# EAGLE board KnivesPanel (EAGLE 9.6.0)
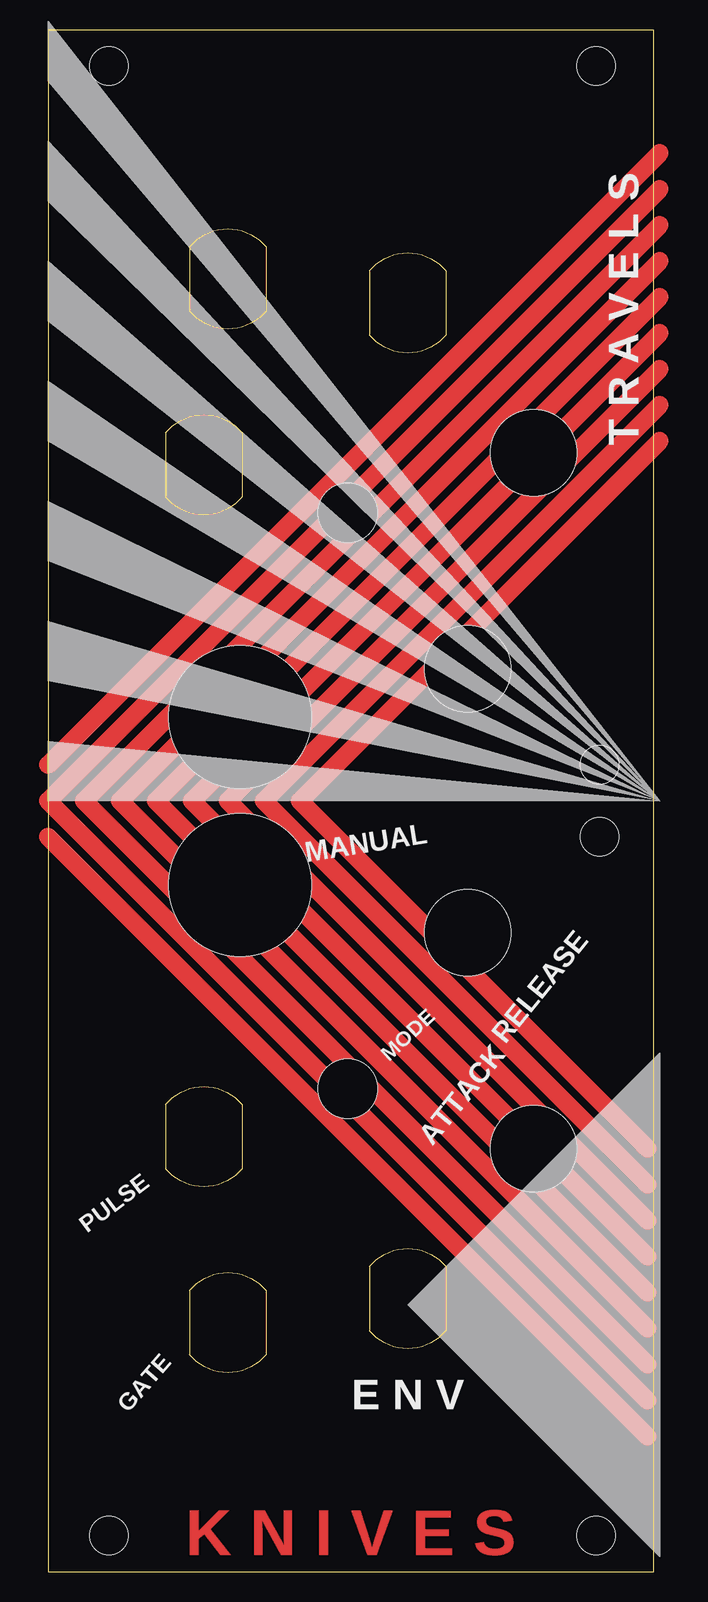
[diagram p0: board, top side]
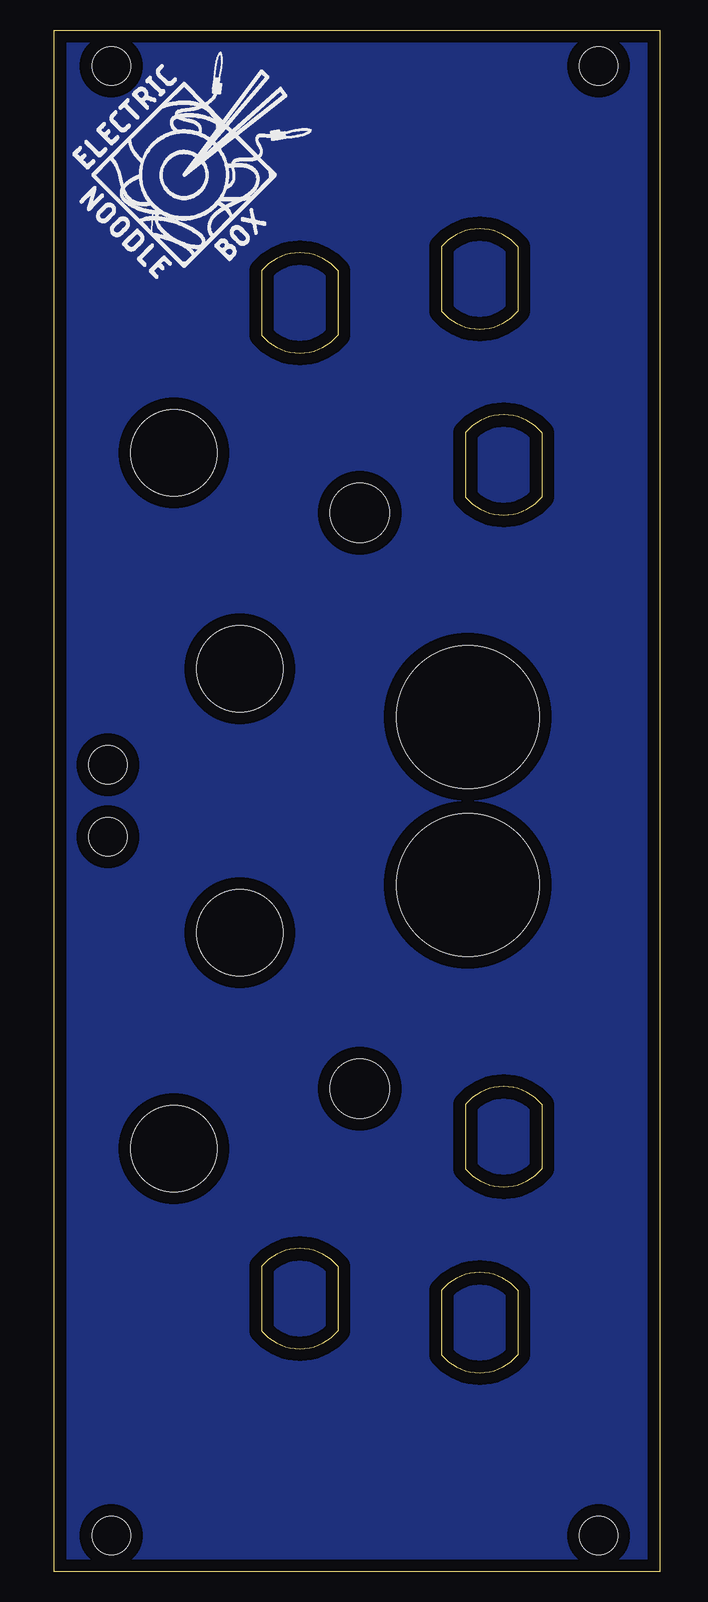
[diagram p1: board, bottom side, seen from below]

Size 50.5 x 128.5 mm. Coordinates in mm from the lower left corner, seen from the top.
Outline: 0,0 50.5,0 50.5,128.5 0,128.5 0,0
Copper layers (1*16): Top 0.035mm / dielectric 1.5mm / Bottom 0.035mm
Design rules "default": minimum track width 6mil, minimum drill 0.35mm, track to track 6mil, track to pad 6mil, pad to pad 6mil, via to via 6mil, smd to smd 6mil, copper to edge 40mil, drill to drill 6mil, minimum pad ring 10mil, minimum via ring 8mil, stop-mask expansion 4mil, vias tented up to drill 0mil, thermal gap 10mil
Holes 3.2 mm at 5.08,3 45.72,3 5.08,125.5 45.72,125.5

## Footprints (pad centres in the part's own frame; a part is rotated, then mirrored left to right if it is on the bottom)
ALPHA9MM_POT_CUTOUT = hole 7.2: 0,0
3MMLED_CUTOUT = hole 3.2: 0,0
DW1_SWITCH_CUTOUT = hole 4.95: 0,0
MCDTS_BUTTON_ROUND_CUTOUT = hole 11.9: 0,0

## Placement (x,y rotation side)
E$1  [CINCH_BANANA_CUTOUT]  15,107.75 0 top
E$2  [CINCH_BANANA_CUTOUT]  30,105.75 0 top
E$3  [CINCH_BANANA_CUTOUT]  13,92.25 0 top
E$4  [CINCH_BANANA_CUTOUT]  13,36.25 0 top
E$5  [CINCH_BANANA_CUTOUT]  30,22.75 0 top
E$6  [CINCH_BANANA_CUTOUT]  15,20.75 0 top
E$7  [ALPHA9MM_POT_CUTOUT]  40.5,93.25 0 top
E$8  [ALPHA9MM_POT_CUTOUT]  35,75.25 0 top
E$9  [ALPHA9MM_POT_CUTOUT]  35,53.25 0 top
E$10  [ALPHA9MM_POT_CUTOUT]  40.5,35.25 0 top
E$11  [3MMLED_CUTOUT]  46,67.25 0 top
E$12  [3MMLED_CUTOUT]  46,61.25 0 top
E$13  [DW1_SWITCH_CUTOUT]  25,88.25 0 top
E$14  [DW1_SWITCH_CUTOUT]  25,40.25 0 top
E$15  [MCDTS_BUTTON_ROUND_CUTOUT]  16,71.25 0 top
E$16  [MCDTS_BUTTON_ROUND_CUTOUT]  16,57.25 0 top
E$17  [LOGO20X20]  49,107.25 0 bottom

## Library data of the parts
E$1-E$17 = ElectricNoodleBox

## Tracks (layer width: path | path; a pad name or v marks a point on that pad's centre or on a via)
GND
  pour Bottom: 0,0 50.5,0 50.5,128.5 0,128.5
S$1
  Top 1.5: 51,115.25 0,64.25 50,14.25
S$2
  Top 1.5: 0,67.25 51,118.25
S$3
  Top 1.5: 0,61.25 50,11.25
S$4
  Top 1.5: 51,112.25 3,64.25 50,17.25
S$5
  Top 1.5: 51,109.25 6,64.25 50,20.25
S$6
  Top 1.5: 51,106.25 9,64.25 50,23.25
S$7
  Top 1.5: 51,103.25 12,64.25 50,26.25
S$8
  Top 1.5: 51,100.25 15,64.25 50,29.25
S$9
  Top 1.5: 51,97.25 18,64.25 50,32.25
S$10
  Top 1.5: 51,94.25 21,64.25 50,35.25

## Text on the board
Top: K N I V E S
tPlace: T R A V E L S | MANUAL | RELEASE | MODE | ATTACK | PULSE | GATE | E N V
tStop: E N V | GATE | PULSE | ATTACK | MODE | RELEASE | MANUAL | E S S E N C E | K N I V E S